# EAGLE board business card serial (EAGLE 9.2.2)
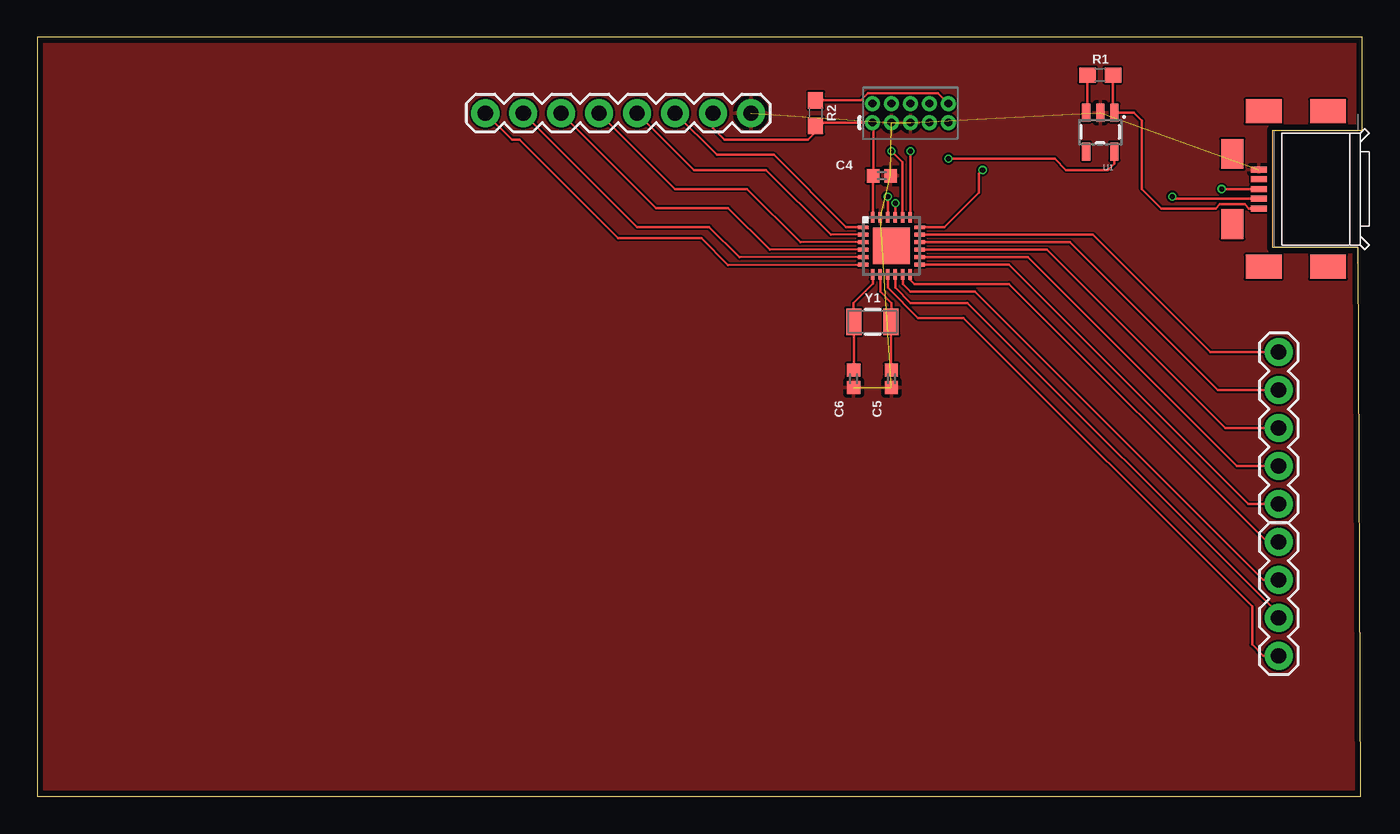
[diagram p0: board, top side]
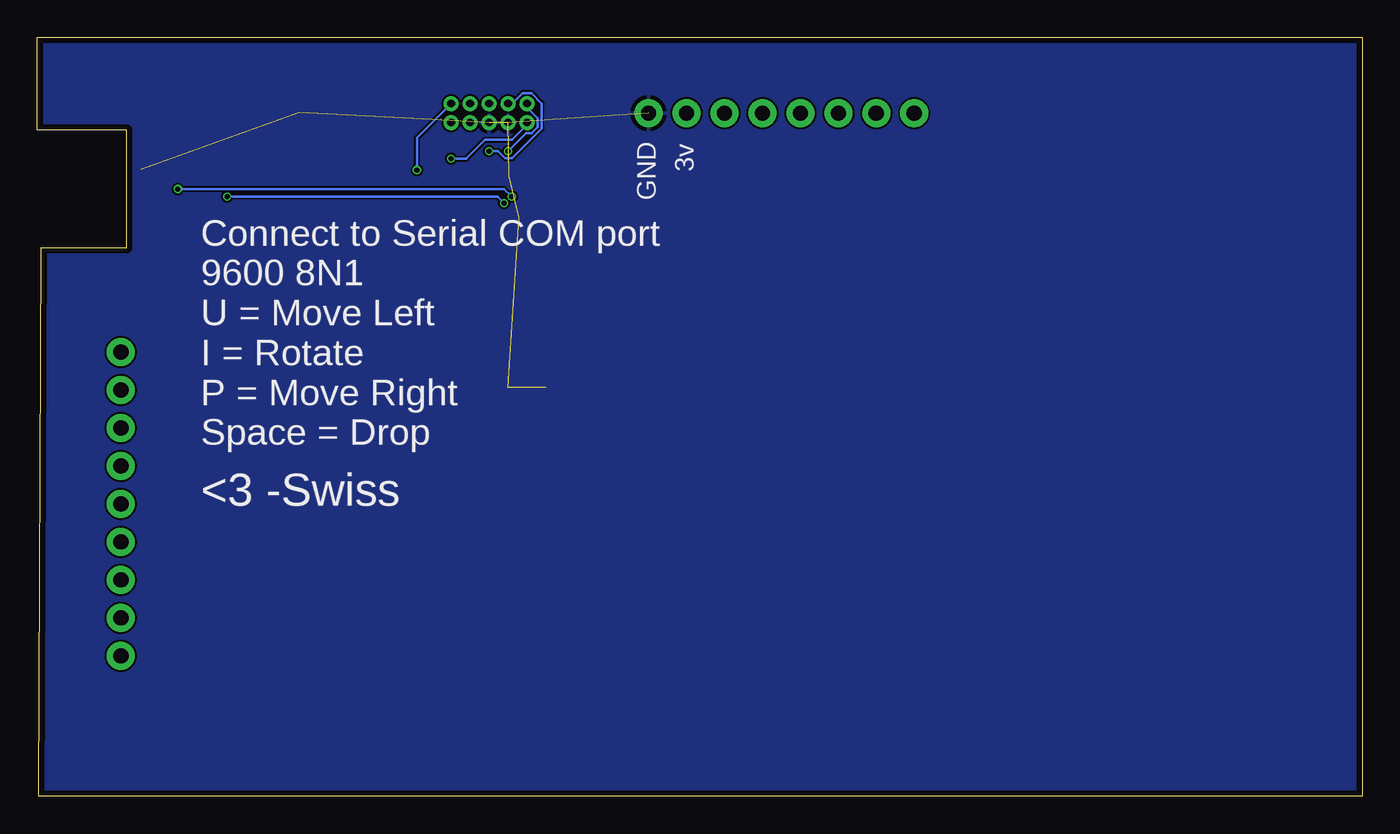
[diagram p1: board, bottom side, seen from below]

Size 88.65 x 50.79 mm. Coordinates in mm from the lower left corner, seen from the top.
Outline: 0,0 88.57,0 88.39,36.58 88.39,36.7 82.68,36.7 82.68,44.58 88.65,44.58 88.65,50.79 0,50.79 0,0
Copper layers (1*16): Top 0.035mm / dielectric 1.5mm / Bottom 0.035mm
Design rules "MF_Standard_2_Layer *": minimum track width 5mil, minimum drill 10mil, track to track 5mil, track to pad 5mil, pad to pad 5mil, via to via 5mil, smd to smd 0mil, copper to edge 15mil, drill to drill 10mil, minimum pad ring 4mil, minimum via ring 4mil, stop-mask expansion 2mil, vias tented up to drill 25mil, thermal gap 10mil

## Footprints (pad centres in the part's own frame; a part is rotated, then mirrored left to right if it is on the bottom)
0402 = smd 0.85 x 0.9: 1 -0.58,0; 2 0.58,0
2X5-PTH-1.27MM = drill 0.508 pad 1: 1 -2.54,-0.635; 2 -2.54,0.635; 3 -1.27,-0.635; 4 -1.27,0.635; 5 0,-0.635; 6 0,0.635; 7 1.27,-0.635; 8 1.27,0.635; 9 2.54,-0.635; 10 2.54,0.635
1X05 = drill 1.016 pad 1.88: 1 0,0; 2 2.54,0; 3 5.08,0; 4 7.62,0; 5 10.16,0
1X04 = drill 1.016 pad 1.88: 1 0,0; 2 2.54,0; 3 5.08,0; 4 7.62,0
1X08 = drill 1.016 pad 1.88: 1 0,0; 2 2.54,0; 3 5.08,0; 4 7.62,0; 5 10.16,0; 6 12.7,0; 7 15.24,0; 8 17.78,0
HRS_ZX62M-B-5P(01) = smd 0.4 x 1.05: 1 -1.3,3.355; 2 -0.65,3.355; 3 0,3.355; 4 0.65,3.355; 5 1.3,3.355 | smd 1.6 x 2.4: S1 5.2,-1.27; S2 -5.2,-1.27; S3 -5.2,3.03; S6 5.2,3.03 | smd 2 x 1.5: S4 -2.35,5.13; S5 2.35,5.13
0603 = smd 1.1 x 1: 1 -0.85,0; 2 0.85,0
SOT23-5 = smd 0.55 x 1.2: 1 -0.95,-1.3; 2 0,-1.3; 3 0.95,-1.3; 4 0.95,1.3; 5 -0.95,1.3
QFN24-4X4 = smd 0.7 x 0.25: 1 -1.9,1.25; 2 -1.9,0.75; 3 -1.9,0.25; 4 -1.9,-0.25; 5 -1.9,-0.75; 6 -1.9,-1.25; 13 1.9,-1.25; 14 1.9,-0.75; 15 1.9,-0.25; 16 1.9,0.25; 17 1.9,0.75; 18 1.9,1.25 | smd 0.25 x 0.7: 7 -1.25,-1.9; 8 -0.75,-1.9; 9 -0.25,-1.9; 10 0.25,-1.9; 11 0.75,-1.9; 12 1.25,-1.9; 19 1.25,1.9; 20 0.75,1.9; 21 0.25,1.9; 22 -0.25,1.9; 23 -0.75,1.9; 24 -1.25,1.9 | smd 2.45 x 2.45: EXP 0,0
CRYSTAL-SMD-3.2X1.5MM = smd 1 x 1.8: P$1 -1.25,0; P$2 1.25,0

## Placement (x,y rotation side)
C4  1.0uF  [0402]  56.52,41.53 180 top
C5  7.0uF  [0402]  57.15,27.94 270 top
C6  7.0uF  [0402]  54.61,27.94 270 top
J1  CORTEX_DEBUG  [2X5-PTH-1.27MM]  58.42,45.72 0 top
J3  [1X05]  83.06,29.72 270 top
J4  [1X04]  83.06,17.02 270 top
J5  [1X08]  29.97,45.72 0 top
P1  ZX62M-B-5P(01)  [HRS_ZX62M-B-5P(01)]  85.09,40.64 90 top
R1  10k  [0603]  71.12,48.26 0 top
R2  10k  [0603]  52.07,45.72 270 top
U1  3.3V  [SOT23-5]  71.12,44.45 180 top
U$1  QFN  [QFN24-4X4]  57.15,36.83 0 top
Y1  32.768kHz  [CRYSTAL-SMD-3.2X1.5MM]  55.88,31.75 0 top

## Library data of the parts
C4-C6 = SparkFun-Capacitors; PROD_ID: CAP-12417
J1 J3 = SparkFun-Connectors
J4 = SparkFun-Connectors; PROD_ID: CONN-09696
J5 = SparkFun-Connectors; PROD_ID: CONN-08438
P1 = ZX62M-B-5P_01_; AVAILABILITY: Unavailable; DESCRIPTION: Conn Micro USB 2.0 Type B RCP 5 POS 0.65mm Solder RA SMD 5 Terminal 1 Port T/R; MF: Hirose; MP: ZX62M-B-5P_01_; PACKAGE: None; PRICE: None
R1 R2 = SparkFun-Resistors; PROD_ID: RES-00818
U1 = SparkFun-IC-Power; PROD_ID: VREG-12457
U$1 = SAMD11C14
Y1 = SparkFun-Clocks; PROD_ID: XTAL-13062

## Nets
3V: C4.2 J1.1 J5.7 R2.2 U1.5 U$1.24
!RESET: J1.10 R2.1 U$1.18
D2: J5.6 U$1.1
D3: J5.5 U$1.2
D4: J5.4 U$1.3
D5: J5.3 U$1.4
D6: J5.2 U$1.5
D7: J5.1 U$1.6
D10: J4.4 U$1.9
D11: J4.3 U$1.10
D14: J4.2 U$1.11
D15: J4.1 U$1.12
D16: J3.5 U$1.13
D17: J3.4 U$1.14
D27: J3.1 U$1.17
D+: P1.3 U$1.22
D-: P1.2 U$1.21
GND: C4.1 C5.2 C6.2 J1.3 J1.5 J5.8 P1.5 U1.2 U$1.23
N$2: C6.1 U$1.7 Y1.P$1
N$3: C5.1 U$1.8 Y1.P$2
N$4: J1.9
N$5: R1.1 U1.3
N$7: J1.8
N$9: J1.7
N$10: J1.6
SCL: J3.2 U$1.16
SDA: J3.3 U$1.15
SWDCLK: J1.4 U$1.19
SWDIO: J1.2 U$1.20
VCC: P1.1 R1.2 U1.1

## Tracks (layer width: path | path; a pad name or v marks a point on that pad's centre or on a via)
3V  (via drill 0.35)
  Top 0.152: U$1.24 55.9,41.49 C4.2 55.94,45.03 J1.1 52.28,45.09 R2.2 52.07,44.45 51.56,43.94 45.97,43.94 45.21,44.7 J5.7 | U1.5 72.07,42.35 71.63,41.91 68.83,41.91 68.07,42.67 v60.96,42.67
  Bottom 0.152: v60.96,42.67 59.94,42.67 58.67,43.94 56.9,43.94 55.88,44.96 J1.1
!RESET  (via drill 0.35)  (1 unrouted)
  Top 0.152: R2.1 55.1,46.57 55.59,47.06 60.26,47.06 J1.10 | 59.07,38.1 60.71,38.1 62.99,40.39 62.99,41.66 v63.25,41.91
  Bottom 0.152: v63.25,41.91 63.25,44.07 J1.10
D2
  Top 0.127: 55.24,38.1 U$1.1
  Top 0.152: U$1.1 54.12,38.08 49.28,42.93 45.47,42.93 J5.6
D3
  Top 0.127: 53.09,37.59 55.24,37.59 U$1.2
  Top 0.152: 53.09,37.59 48.77,41.91 43.94,41.91 J5.5
D4
  Top 0.127: 51.05,37.08 U$1.3
  Top 0.152: 51.05,37.08 47.5,40.64 42.67,40.64 J5.4
D5
  Top 0.127: U$1.4 49.02,36.58
  Top 0.152: 49.02,36.58 46.23,39.37 41.4,39.37 J5.3
D6
  Top 0.127: U$1.5 55.24,36.07 46.99,36.07
  Top 0.152: 46.99,36.07 44.96,38.1 40.13,38.1 J5.2
D7
  Top 0.127: 46.23,35.56 55.23,35.56 U$1.6
  Top 0.152: 46.23,35.56 44.45,37.34 38.86,37.34 32.26,43.94 31.75,43.94 J5.1
D10
  Top 0.127: 57.02,34.92 U$1.9
  Top 0.152: U$1.9 56.9,34.03 58.93,32 61.98,32 81.28,12.7 81.28,10.16 82.04,9.4 J4.4
D11
  Top 0.127: 57.4,34.67 U$1.10
  Top 0.152: J4.3 83.06,12.19 62.23,33.02 58.42,33.02 57.4,34.04 U$1.10
D14
  Top 0.127: 57.91,34.67 57.91,34.92 U$1.11
  Top 0.152: J4.2 82.04,14.48 62.74,33.78 58.42,33.78 57.91,34.29 57.91,34.67
D15
  Top 0.152: J4.1 82.3,17.02 65.02,34.29 58.67,34.29 58.4,34.56 U$1.12
D16
  Top 0.127: 59.05,35.56 U$1.13
  Top 0.152: U$1.13 65,35.58 81.03,19.56 J3.5
D17
  Top 0.127: 59.05,36.07 U$1.14
  Top 0.152: U$1.14 66.28,36.08 80.26,22.1 J3.4
D27
  Top 0.152: U$1.17 70.62,37.58 78.49,29.72 J3.1
D+  (via drill 0.35)
  Top 0.152: U$1.22 56.9,39.87 56.9,39.88 v56.9,40.13 | v79.25,40.64 P1.3
  Bottom 0.152: v56.9,40.13 57.4,40.64 v79.25,40.64
D-  (via drill 0.35)
  Top 0.152: U$1.21 57.4,39.37 57.4,39.68 v57.42,39.69 | v75.95,40.13 76.09,39.99 P1.2
  Bottom 0.152: v57.42,39.69 57.86,40.13 v75.95,40.13
GND  (8 unrouted)
  pour Top: 0,50.8 88.9,50.8 88.9,0 0,0
  pour Bottom: 0,50.8 88.9,50.8 88.9,0 0,0
N$2
  Top 0.152: U$1.7 55.9,34.31 54.61,33.02 54.61,31.77 Y1.P$1 54.63,28.54 C6.1
N$3
  Top 0.152: U$1.8 56.4,33.77 57.15,33.02 57.15,31.77 Y1.P$2 57.13,28.54 C5.1
N$5
  Top 0.152: R1.1 70.27,45.85 U1.3
SCL
  Top 0.152: U$1.16 69.09,37.08 78.99,27.18 J3.2
SDA
  Top 0.127: U$1.15
  Top 0.152: U$1.15 67.56,36.58 79.5,24.64 J3.3
SWDCLK  (via drill 0.35)
  Top 0.152: U$1.19 58.42,38.75 v58.42,43.18
  Bottom 0.152: v58.42,43.18 57.83,43.18 57.35,42.7 56.88,42.7 54.9,44.68 54.9,46.37 55.59,47.06 56.17,47.06 56.87,46.35 J1.4
SWDIO  (via drill 0.35)
  Top 0.152: U$1.20 57.9,42.43 v57.15,43.18
  Bottom 0.152: v57.15,43.18 55.95,44.38 55.59,44.38 55.18,44.79 55.18,45.38 55.88,46.08 J1.2
VCC
  Top 0.152: R1.2 71.97,45.85 U1.1 73.38,45.75 73.91,45.21 73.91,40.64 75.21,39.34 78.85,39.34 79.13,39.62 80.79,39.62 81.07,39.34 P1.1

## Text on the board
bNames: 3v | GND | Connect to Serial COM port / 9600 8N1 / U = Move Left / I = Rotate / P = Move Right / Space = Drop | <3 -Swiss
tStop: Michael Bales | CEO | Santa Barbara Hackerspace, Inc. | 5782 Thornwood Drive | Goleta, CA 93117 | (805) 242-2533 | mbales@sbhackerspace.com